# Altium PCB PCB1.PcbDoc (part 3 of 3)
Units mil, origin at the board's own origin, x right, y up, seen from the top; angles counter-clockwise.
Board outline 3937.79 x 3937.79 mil, 4 copper layers (L1, L2, L3, L4), stack 61.811 mil thick; 103 components, 203 nets, 917 pads, 494 vias.
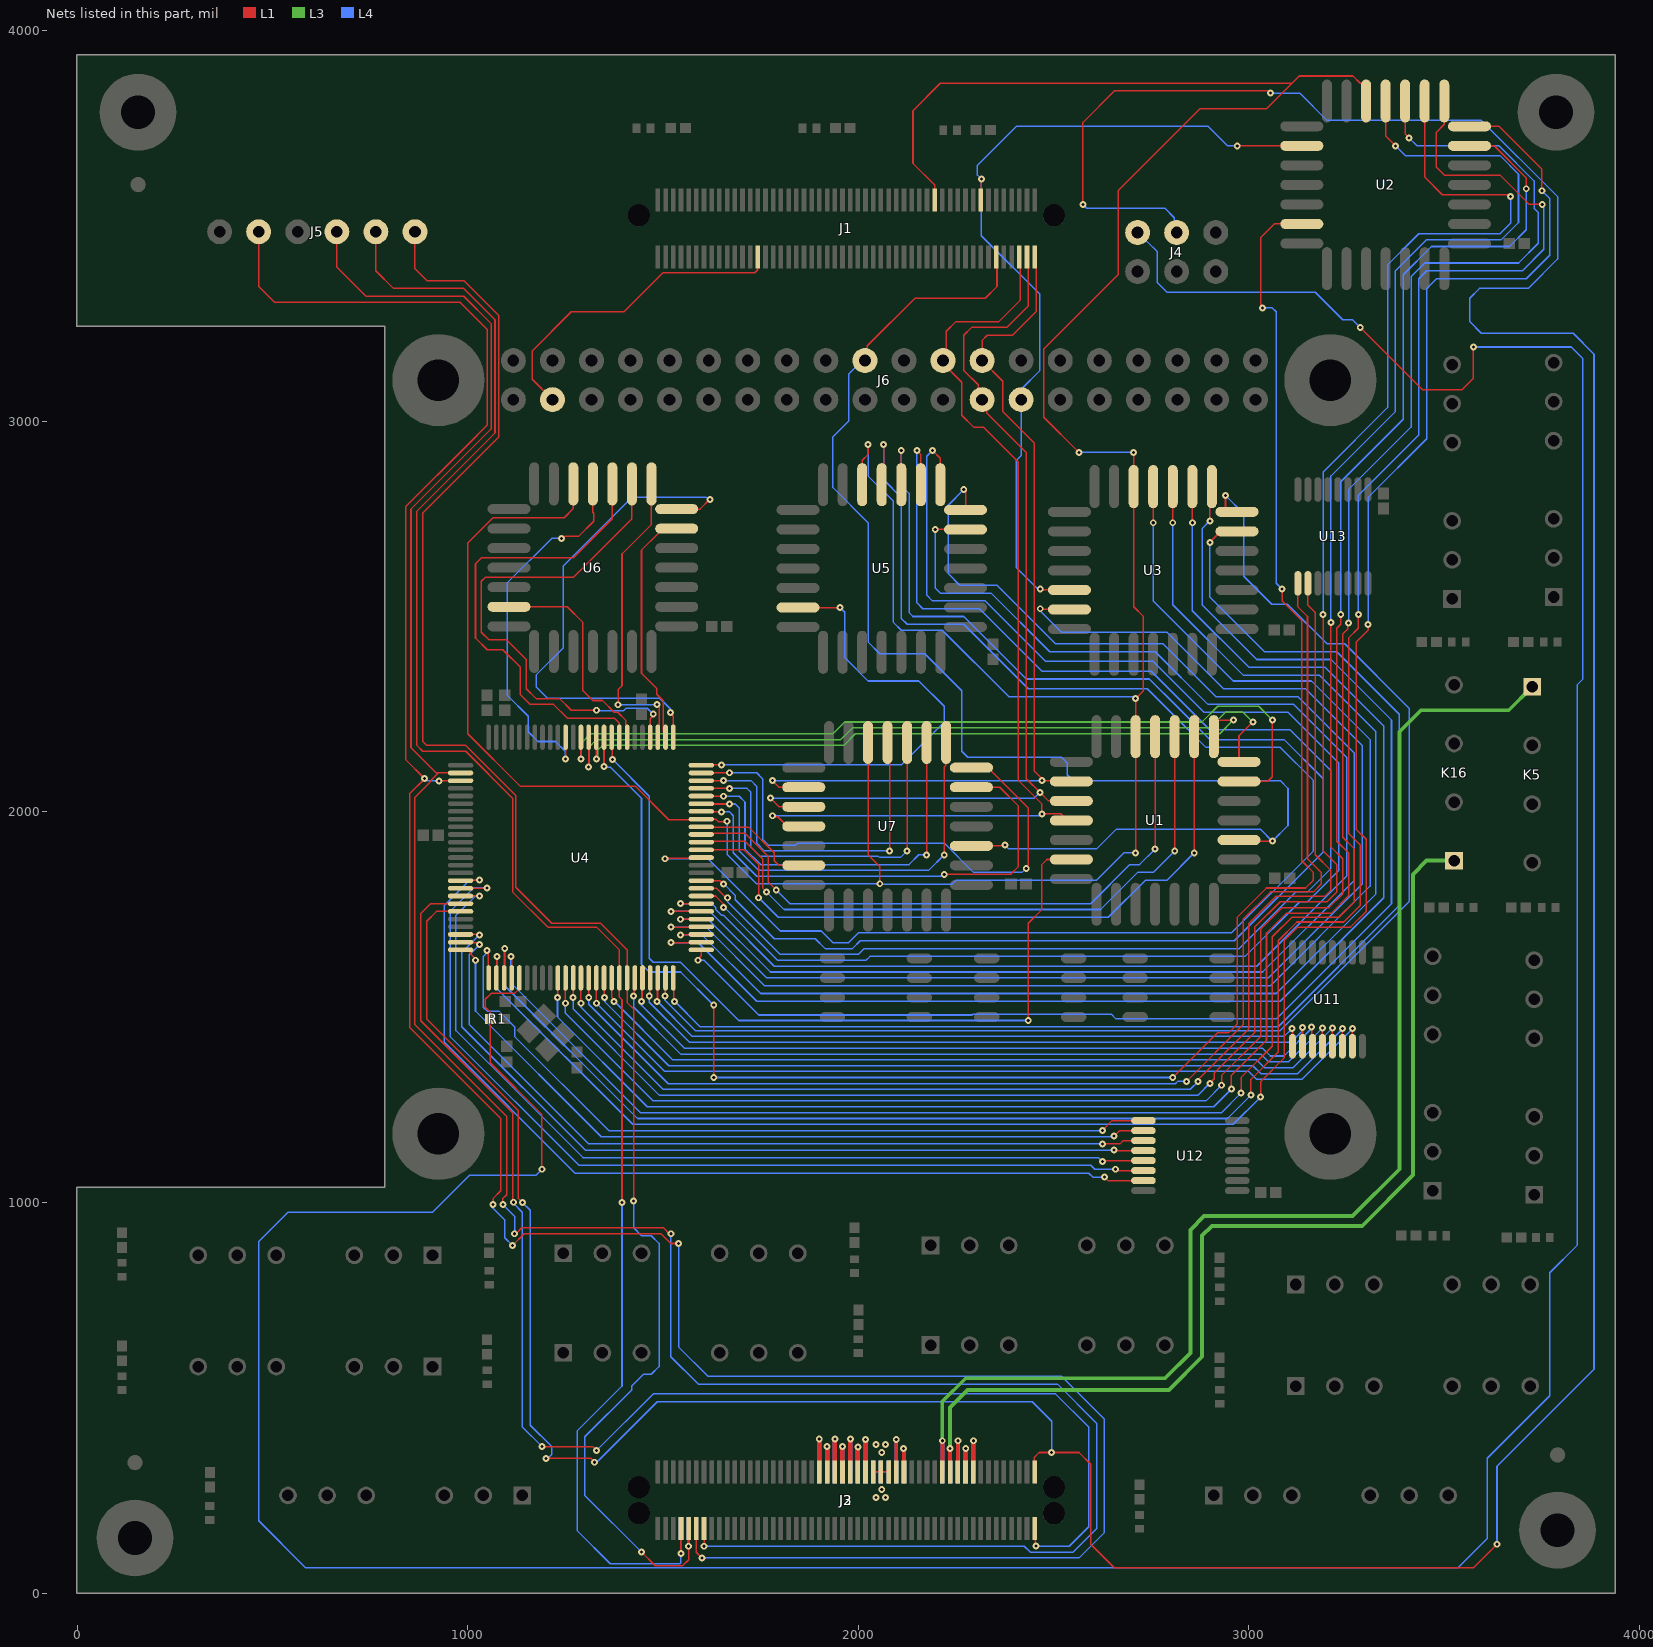
[diagram p5: the nets of this part, all layers, seen from the top]

## Via types
v1: diameter 17.72, hole 7.87, L1 to L4, 494 vias

## Nets (pads, with @x,y where several pads share a name; then routed paths per layer and width w, separated by ;. In a path a pad name is that pad's centre, name@x,y a point inside that pad or via, vN(x,y) a via of type N, cw(c..) or ccw(c..) an arc to the next point about the centre after c; other vN are vias at no path point) (continued)
RASP_GPIO22: J1.98 J6.15 U1.7 U7.7 | length 2459.3
  L1 w4: v1(1775,2035) 1797,2013 U7.7@1860.43,2013 ; J1.98@2430,3425 2435,3420 2435,3295 2380,3240 2290,3240 2270,3220 2270,3130 2306.91,3093.09 2306.91,3065.22 J6.15@2316.93,3055.2 2328.37,3043.76 2328.37,3021.63 2430,2920 2430,2085 v1(2465,2050) 2487.14,2027.86 2545.3,2027.86 U1.7@2545.43,2028
  L4 w4: v1(1775,2035) 2450,2035 v1(2465,2050)
RASP_GPIO23: J1.100 J6.16 U1.6 U7.6 | length 2357.4
  L1 w4: v1(1780,2080) 1797,2063 U7.6@1860.43,2063 ; J1.100@2455,3425 2455,3280 2395,3220 2330,3220 2316.93,3206.93 J6.16@2316.93,3155.2 2370,3102.13 2370,3025 2450,2945 2450,2105 2470,2085 v1(2470,2080) 2543.43,2080 U1.6@2545.43,2078
  L4 w4: v1(1780,2080) v1(2470,2080)
RASP_GPIO24: J1.96 J6.18 U1.8 U7.8 | length 2537
  L1 w4: v1(1780,1990) 1782.62,1987.38 1793.73,1987.38 1818.11,1963 U7.8@1860.43,1963 ; J6.18@2213.36,3151.64 2265,3100 2265,3015 2295,2985 2320,2985 2410,2895 2410,2080 2470,2020 v1(2470,1995) 2518.43,1995 U1.8@2528.43,1985 ; J6.18@2216.93,3155.2 2225,3163.27 2225,3230 2250,3255 2360,3255 2415,3310 2415,3417.91 J1.96@2412.17,3420.75
  L4 w4: v1(1780,1990) 2465,1990 v1(2470,1995)
RASP_GPIO25: J1.90 J6.22 U1.21 U7.21 | length 3696.1
  L1 w4: J6.22@2016.93,3155.2 2023.09,3161.36 2023.09,3193.09 2145,3315 2325,3315 2355,3345 J1.90@2355,3425 ; U7.21@2289.57,1913 2373,1913 v1(2375,1915) ; U1.21@2974.57,1928 2977.56,1925 v1(3060,1925)
  L4 w4: J6.22@2016.93,3155.2 2010.2,3155.2 1975,3120 1975,3000 1935,2960 1935,2830 2025,2740 2025,2435 2055,2405 2170,2405 2265,2310 2265,2155 2280,2140 2520,2140 2535,2125 2535,2095 2550,2080 3080,2080 3100,2060 3100,1965 v1(3060,1925) ; v1(2375,1915) 2385,1905 2610,1905 2660,1955 3030,1955 v1(3060,1925)
RASP_GPIO26: J1.28 J6.37 | length 844.8
  L1 w4: J6.37@1216.93,3055.2 1216.93,3058.07 1214.06,3058.07 1165,3107.13 1165,3180 1265,3280 1400,3280 1500,3380 1735,3380 1742.87,3387.87 J1.28@1742.87,3420.75
RASP_GPIO27: J1.85 J6.13 U2.6 U3.9 | length 2226.8
  L1 w4: J1.85@2313.74,3566.42 2314.37,3567.05 2314.37,3619.37 v1(2315,3620) ; v1(2465.86,2570) 2466.86,2569 2539.43,2569 U3.9@2540.43,2568 ; v1(2970,3705) U2.6@3135.43,3705
  L4 w4: v1(2465.86,2570) 2460,2570 2405,2625 2405,2900 2416.93,2911.93 J6.13@2416.93,3055.2 2416.93,3081.93 2465,3130 2465,3325 2315,3475 v1(2315,3620) 2305,3630 2305,3655 2405,3755 2895,3755 2945,3705 v1(2970,3705)
RELAY0: U4.24 U12.3 | length 2121.5
  L1 w4: U4.24@981.93,1666.46 983.27,1665.12 1024.88,1665.12 v1(1030,1660) ; v1(2625,1150) 2670,1150 2678.39,1158.39 U12.3@2729.92,1158.39
  L4 w4: v1(1030,1660) 1004.14,1634.14 1004.14,1455.86 1310,1150 v1(2625,1150)
RELAY1: U4.25 U12.2 | length 2034.5
  L1 w4: U4.25@981.93,1646.78 1002.89,1646.78 1006.5,1643.17 1006.5,1637.21 1017.38,1626.34 1017.38,1622.62 v1(1020,1620) ; v1(2655,1170) 2668.98,1183.98 U12.2@2729.92,1183.98
  L4 w4: v1(1020,1620) 1020,1490 1341.72,1168.28 2653.28,1168.28 v1(2655,1170)
RELAY2: U4.18 U12.5 | length 2323.6
  L1 w4: U4.18@981.93,1784.57 982.14,1784.79 1029.79,1784.79 v1(1030,1785) ; v1(2625,1105) 2627.2,1107.2 U12.5@2729.92,1107.2
  L4 w4: v1(1030,1785) 1028.49,1783.49 1018.49,1783.49 970,1735 970,1440 1295,1115 2613.99,1115 2623.99,1105 v1(2625,1105)
RELAY3: U4.16 U12.7 | length 2452
  L1 w4: U4.16@981.93,1823.94 982.46,1824.47 1029.47,1824.47 v1(1030,1825) ; v1(2630,1065) 2638.98,1056.02 U12.7@2729.92,1056.02
  L4 w4: v1(1030,1825) 1005,1825 940,1760 940,1410 1275,1075 2590,1075 2600,1065 v1(2630,1065)
RELAY4: U4.45 U11.4 | length 1980.2
  L1 w4: v1(1424.82,1528.81) 1426.31,1530.3 1426.31,1573.44 U4.45@1427.8,1574.93 ; U11.4@3188.23,1400 v1(3188.23,1446.77)
  L4 w4: v1(1424.82,1528.81) 1425,1528.63 1425,1500 1545,1380 3030,1380 3050,1360 3101.46,1360 v1(3188.23,1446.77)
RELAY5: U4.42 U11.5 | length 2061.2
  L1 w4: U4.42@1368.74,1574.93 1368.74,1524.97 1375,1518.71 v1(1375,1515) ; U11.5@3213.82,1400 v1(3213.82,1446.18)
  L4 w4: v1(1375,1515) 1525,1365 3020,1365 3040,1345 3112.64,1345 3211.46,1443.82 3213.82,1443.82 v1(3213.82,1446.18)
RELAY6: U4.26 U12.1 | length 2068.6
  L1 w4: v1(1050,1645) 1052.29,1642.71 1052.29,1576.42 U4.26@1053.78,1574.93 ; v1(2625,1184.14) 2625,1185 2649.57,1209.57 U12.1@2729.92,1209.57
  L4 w4: v1(1050,1645) 1050.84,1644.16 1050.84,1640.84 1040,1630 1040,1500 1050,1490 1080,1490 1120,1450 1120,1425 1360.86,1184.14 2623.28,1184.14 2624.14,1185 v1(2625,1184.14)
RELAY7: U4.23 U12.4 | length 2178.4
  L1 w4: U4.23@981.93,1686.15 1028.85,1686.15 v1(1030,1685) ; v1(2655,1134.14) 2655.86,1134.14 2657.2,1132.8 U12.4@2729.92,1132.8
  L4 w4: v1@1029.92,1684.92 985,1640 985,1450 1300.86,1134.14 v1(2655,1134.14)
RELAY8: U4.17 U12.6 | length 2425.4
  L1 w4: U4.17@981.93,1804.26 982.3,1804.63 1049.63,1804.63 v1(1050,1805) ; v1(2658.23,1085) 2661.61,1081.61 U12.6@2729.92,1081.61
  L4 w4: v1(1050,1805) 1015,1805 955,1745 955,1425 1285,1095 2595,1095 2605,1085 v1(2658.23,1085)
RELAY9: U4.46 U11.3 | length 1926.3
  L1 w4: v1(1445,1515) 1446.24,1516.24 1446.24,1573.68 U4.46@1447.48,1574.93 ; v1(3159.7,1449.63) 3161.17,1448.16 3161.17,1401.47 U11.3@3162.64,1400 U11.3@3160.99,1398.36
  L4 w4: v1(1445,1515) 1445,1505 1555,1395 3035,1395 3055,1375 3089.62,1375 3159.62,1445 3159.62,1449.55 v1(3159.7,1449.63)
RELAY10: U4.41 U11.6 | length 2119.8
  L1 w4: U4.41@1349.06,1574.93 1349.53,1574.45 1349.53,1525.47 v1(1350,1525) ; U11.6@3239.41,1400 3239.41,1444.41 v1(3240,1445)
  L4 w4: v1(1350,1525) 1351.51,1523.49 1351.51,1513.49 1515,1350 3010,1350 3030,1330 3125,1330 v1(3240,1445)
RELAY11: U4.40 U11.7 | length 2179.8
  L1 w4: U4.40@1329.37,1574.93 1329.68,1574.61 1329.68,1510.32 v1(1330,1510) ; U11.7@3265,1400 v1(3265,1445)
  L4 w4: v1(1330,1510) 1504.14,1335.86 2999.14,1335.86 3020,1315 3135,1315 v1(3265,1445)
RELAY12: U4.38 U13.2 | length 3263.6
  L1 w4: v1(1290,1510) U4.38@1290,1574.93 ; v1(2870,1310) 2870,1315 3000,1445 3000,1715 3068.42,1783.42 3193.42,1783.42 3210,1800 3210,1850 3170,1890 3170,2510 3151.02,2528.98 U13.2@3151.02,2584.92
  L4 w4: v1(1290,1510) 1290,1500 1500,1290 2850,1290 v1(2870,1310)
RELAY13: U4.39 U13.1 | length 3191.1
  L1 w4: U4.39@1309.68,1574.93 1309.84,1574.77 1309.84,1525.16 v1(1310,1525) ; v1(2840,1310) 2985,1455 2985,1725 3055,1795 3165,1795 3185,1815 3185,1845 3150,1880 3150,2500 3125.43,2524.57 U13.1@3125.43,2584.92
  L4 w4: v1(1310,1525) 1310,1507.57 1513.43,1304.14 2811.57,1304.14 2817.43,1310 v1(2840,1310)
RELAY14: U4.47 U11.2 | length 1846.5
  L1 w4: v1(1464.85,1528.72) 1466.01,1529.88 1466.01,1573.77 U4.47@1467.17,1574.93 ; U11.2@3137.05,1400 v1(3137.05,1447.95)
  L4 w4: v1(1464.85,1528.72) 1465,1528.57 1465,1512.57 1567.57,1410 3107.43,1410 3137.05,1439.62 v1(3137.05,1447.95)
RELAY15: U4.48 U11.1 | length 1776.9
  L1 w4: v1(1485,1515) 1485.93,1515.93 1485.93,1574 U4.48@1486.85,1574.93 ; v1(3110,1445) 3111.46,1443.54 U11.1@3111.46,1400
  L4 w4: v1(1485,1515) 1575,1425 3090,1425 v1(3110,1445)
RESET1: U1.10 U4.84 | length 2136.3
  L1 w4: U4.84@1368.74,2191.07 1369.99,2189.82 1369.99,2135.01 v1(1371.24,2133.76) ; v1(2435,1465.86) 2435,1715 2470,1750 2470,1865 2483,1878 U1.10@2545.43,1878
  L4 w4: v1(1371.24,2133.76) 1465,2040 1465,1625 1475,1615 1545,1615 1694.14,1465.86 v1(2435,1465.86)
RESET2: U2.10 U4.85 | length 4775.5
  L1 w4: v1(1349.06,2115.94) U4.85@1349.06,2191.07 ; v1@1626.66,1498.34 1630,1495 v1(1630,1320) ; v1(2805,1320) 2920,1435 2948.69,1435 2969.7,1456.01 2969.7,1729.7 3045,1805 3145,1805 3165,1825 3165,1845 3135,1875 3135,2490 3085,2540 v1(3085,2570) ; v1(3035,3290) 3030,3295 3030,3470 3065,3505 U2.10@3135.43,3505
  L4 w4: v1@1350.71,2114.29 1365.71,2114.29 1445,2035 1445,1610 1465,1590 1545,1590 v1(1630,1505) ; v1(1630,1320) v1(2805,1320) ; v1(3035,3290) 3060,3290 3070,3280 3070,2585 v1(3085,2570)
RESET3: U3.10 U4.55 | length 3363.6
  L1 w4: v1(1545,1725) U4.55@1598.07,1725 ; v1(2465.86,2520) 2466.86,2519 2539.43,2519 U3.10@2540.43,2518
  L4 w4: v1(1545,1725) 1615,1725 1765,1575 3050,1575 3290,1815 3290,2170 3145,2315 2935,2315 2790,2460 2520,2460 2464.59,2515.41 2465.86,2516.69 v1(2465.86,2520)
RESET4: U4.75 U5.10 | length 1255.1
  L1 w4: U4.75@1598.07,2119.22 1598.89,2120.04 v1(1649.96,2120.04) ; U5.10@1845.43,2523 v1(1953,2523)
  L4 w4: v1(1649.96,2120.04) 1650.78,2120.86 2110.86,2120.86 2200,2210 ; v1(1953,2523) 1965,2510.99 1965,2395 2025,2335 2155,2335 2220,2270 2220,2230 2200,2210
RESET5: U4.82 U6.10 | length 566.5
  L1 w4: U6.10@1105.87,2525 1255,2525 1295,2485 1295,2310 1320,2285 1345,2285 1375,2255 1384.14,2255 1405,2234.14 1405,2222.87 1408.11,2219.76 U4.82@1408.11,2191.07
RESET6: U4.67 U7.10 | length 317.3
  L1 w4: U4.67@1595,1960 1720,1960 1785,1895 1785,1875 1797,1863 U7.10@1860.43,1863
RST: J4.5 R1.1 U4.30 | length 9943.1
  L1 w4: U4.30@1132.52,1574.93 1132.52,1547.52 1120.17,1535.17 1060.17,1535.17 1045,1520 1045,1500 1057.6,1487.4 R1.1@1057.6,1470 1057.6,1357.4 1190,1225 v1(1190,1085) ; v1(3285,3240) 3445,3080 3545,3080 3574.69,3109.69 v1@3574.69,3190
  L4 w4: v1(1190,1085) 1175,1070 1005,1070 910,975 540,975 465,900 465,185 585,65 3535,65 3610,140 3610,345 3770,505 3770,820 3840,890 3840,2325 3855,2340 3855,3160 3825,3190 v1(3575,3190) ; J4.5@2715,3483 2765,3434.62 2765,3355 2790,3330 3170,3330 3240,3260 3265,3260 v1(3285,3240)
S: J2.43 J3.44 | length 168.9
  L1 w11.55: v1(1900,394.82) 1900.35,394.46 J2.43@1900.35,310.51
  L4 w11.55: v1(1900,394.82) 1900.25,394.57 1900.25,310.62 J3.44@1900.35,310.51
SCK: J2.99 J4.3 U4.20 | length 10436.3
  L1 w4: U4.20@981.93,1745.2 920.2,1745.2 895,1720 895,1470 1130,1235 1130,1010 v1(1140,1000) ; v1(1200,345) 1315,345 v1(1325,335) ; J2.99@2451.54,310.51 2450.77,311.28 2450.77,348.01 2462.76,360 v1(2495,360) 2565,360 2595,330 2595,125 2655,65 3575,65 v1(3635,125) ; v1(2575,3555) 2575,3765 2655.86,3845.86 3049.14,3845.86 v1(3055,3840)
  L4 w4: v1(1140,1000) 1160,980 1160,430 1215,375 1215,355 1205,345 v1(1200,345) ; v1(1325,335) 1328.71,335 1332.72,339.01 1334.01,339.01 1485,490 2445,490 2495,440 v1(2495,360) ; v1(2575,3555) 2585,3545 2785,3545 2809.11,3520.89 2809.11,3488.88 J4.3@2815,3483 2815,3475 J4.3@2807,3475 ; v1(3055,3840) 3130,3840 3200,3770 3595,3770 3790,3575 3790,3415 3715,3340 3590,3340 3565,3315 3565,3255 3595,3225 3830,3225 3883.27,3171.73 3883.27,573.27 3635,325 v1(3635,125)
SCL: J2.8 J3.7 J5.5 U4.43 | length 4495.9
  L1 w4: J5.5@765,3485 765,3385 810,3340 990,3340 1070,3260 1070,2970 870,2770 870,2170 885,2155 995,2155 1115,2035 1115,1795 1205,1705 1330,1705 1388.43,1646.57 U4.43@1388.43,1574.93 1388.43,1525.66 1395,1519.08 v1(1395,1000) ; v1(1546.02,101.02) J2.8@1546.02,164.84
  L4 w4: v1(1395,1000) 1395,530 1280,415 1280,160 1365,75 1543.68,75 1546.02,77.34 J3.7@1546.02,164.84
SDA: J2.10 J3.9 J5.6 U4.44 | length 4419.2
  L1 w4: J5.6@865,3485 865,3390 895,3360 990,3360 1079.04,3270.96 1079.04,2959.04 1025,2905 ; 1025,2905 885,2765 885,2180 895,2170 995,2170 1123,2042 1123,1807 1215,1715 1340,1715 1408.11,1646.89 U4.44@1408.11,1574.93 1408.11,1511.89 1425,1495 v1(1425,1004.14) ; v1(1445,105) 1480,70 1550,70 1565.71,85.71 v1@1565.71,120.71 ; v1(1565,120) v1@1565.71,120.71 ; J2.10@1565.71,164.84 v1@1565.71,120.71
  L4 w4: v1(1425,1004.14) 1425,935 1445,915 1470,915 1490,895 1490,580 1470,560 1450,560 1420,530 1420,520 1300,400 1300,250 v1(1445,105) ; v1(1565,120) 1565.35,120.35 1565.35,164.49 J3.9@1565.71,164.84
SS: J2.100 U4.19 | length 3561.5
  L1 w4: U4.19@981.93,1764.89 904.89,1764.89 880,1740 880,1465 1115,1230 1115,1002.55 v1(1117.04,1000.51) ; v1(1190,375) 1320,375 v1(1330,365) ; J2.100@2451.54,164.84 2453.27,163.11 2453.27,122.59 v1(2455,120.86)
  L4 w4: v1(1117.04,1000.51) 1117.04,997.96 1140,975 1140,425 v1(1190,375) ; v1(1330,365) 1475,510 2505,510 2590,425 2590,170 2540,120 2455.86,120 v1(2455,120.86)
STROBE: J1.73 U1.2 U2.2 U3.2 U4.68 U5.2 U6.2 U7.2 | length 8501.4
  L1 w4: U6.2@1270.43,2839.57 1270.43,2776.32 1247.11,2753 1064.96,2753 1000,2688.04 1000,2200 1135,2065 1430,2065 1515,1980 U4.68@1598.07,1980 ; U4.68@1598.07,1981.42 1635.13,1981.42 1641.55,1975 1663.28,1975 v1(1664.14,1975.86) ; U5.2@2010,2837.56 2010,2900 2025,2915 v1(2025,2940) ; U7.2@2025,2177.56 2025,1890 2055,1860 v1(2055,1815.86) ; J1.73@2195.63,3566.42 2195.63,3604.37 2140,3660 2140,3795 2210,3865 3110,3865 ; v1(2565,2920) 2475,3010 2475,3185 2665,3375 2665,3590 2875,3800 3045,3800 3110,3865 ; v1(2705,2920) U3.2@2705,2832.56 2705,2525 2730,2500 2730,2310 v1(2710,2290) U1.2@2710,2192.56 v1(2710,1895) ; U2.2@3300,3819.57 3300,3855.22 3290.03,3865.19 3284.72,3865.19 3266.27,3883.65 3128.65,3883.65 3110,3865
  L4 w4: v1(1664.14,1975.86) 1665,1975 1665,1890 1739.14,1815.86 v1(2055,1815.86) ; v1(2025,2940) 2025,2860 2090,2795 2090,2485 2110,2465 2215,2465 2385,2295 2701.29,2295 2706.29,2290 v1(2710,2290) ; v1@2055,1815 2240,1815 2250,1825 2610,1825 2680,1895 v1(2710,1895) ; v1(2565,2920) v1(2705,2920)
SW1: U1.24 U4.88 | length 2155.3
  L1 w4: v1(1290,2135) U4.88@1290,2191.07 ; U1.24@2974.57,2078 3048,2078 3060,2090 v1(3060,2235)
  L3 w4: v1(1290,2135) 1290,2175 1315,2200 1935,2200 1965,2230 2880,2230 2920,2270 3025,2270 v1(3060,2235)
SW2: U1.25 U4.87 | length 1990.1
  L1 w4: U4.87@1309.68,2191.07 1309.84,2190.91 v1(1309.84,2115.16) ; U1.25@2974.57,2128 2974.57,2194.57 v1(3010,2230)
  L3 w4: v1@1310,2115.16 1310,2165 1330,2185 1955,2185 1985,2215 2900,2215 2940,2255 2985,2255 v1(3010,2230)
SW3: U1.26 U4.86 | length 1825.1
  L1 w4: U4.86@1329.37,2191.07 1329.37,2135.63 v1(1330,2135) ; U1.26@2910,2192.56 2910,2225.03 2919.97,2235 v1(2960,2235)
  L3 w4: v1@1332.43,2135 1332.43,2157.43 1345,2170 1962.5,2170 1992.5,2200 2925,2200 v1(2960,2235)
SW4: U1.27 U4.64 | length 1749.2
  L1 w4: U4.64@1598.07,1902.68 1707.32,1902.68 1745,1865 v1(1745,1780) ; v1(2860,1895) U1.27@2860,2192.56
  L4 w4: v1(1745,1780) 1795,1730 2640,1730 2735,1825 2790,1825 v1(2860,1895)
SW5: U1.28 U4.65 | length 1684.1
  L1 w4: U4.65@1598.07,1922.37 1626.76,1922.37 1629.39,1925 1710,1925 1755,1880 1755,1805 v1(1765,1795) ; v1(2810,1900) U1.28@2810,2192.56
  L4 w4: v1(1765,1795) 1810,1750 2620,1750 2715,1845 2755,1845 v1(2810,1900)
SW6: U1.1 U4.66 | length 1621.3
  L1 w4: U4.66@1598.07,1942.05 1601.02,1945 1710,1945 1770,1885 1770,1820 v1(1790,1800) ; v1(2760,1905) U1.1@2760,2192.56
  L4 w4: v1(1790,1800) 1825,1765 2595,1765 2695,1865 2720,1865 v1(2760,1905)
SW7: U2.24 U4.35 | length 4973.6
  L1 w4: v1(1230,1525) 1230.47,1525.47 1230.47,1574.45 U4.35@1230.94,1574.93 ; v1(2955,1290) 2955,1325 3045,1415 3045,1690 3095,1740 3210,1740 3255,1785 3255,1895 3225,1925 3225,2470 3235,2480 v1(3235,2505) ; U2.24@3564.57,3705 3627.81,3705 3710,3622.81 v1(3710,3595)
  L4 w4: v1(1230,1525) 1230,1475 1460,1245 2910,1245 v1(2955,1290) ; v1(3235,2505) 3235,2845 3395,3005 3395,3375 3467.28,3447.28 3667.28,3447.28 3710,3490 v1(3710,3595)
SW8: U2.25 U4.27 | length 5421.5
  L1 w4: U4.27@1073.46,1574.93 1074.23,1575.69 1074.23,1629.23 v1(1075,1630) ; v1(3030,1270) 3030,1310 3090,1370 3090,1670 3125,1705 3260,1705 3300,1745 3300,1930 3275,1955 3275,2435 3305,2465 v1(3305,2480) ; U2.25@3564.57,3755 3640,3755 3750,3645 v1(3750,3590)
  L4 w4: v1(1075,1630) 1075,1547.43 1422.43,1200 2960,1200 v1(3030,1270) ; v1(3305,2480) 3305,2805 3455,2955 3455,3340 3480,3365 3710,3365 3770,3425 3770,3570 v1(3750,3590)
SW9: U2.26 U4.28 | length 5565.6
  L1 w4: U4.28@1093.15,1574.93 1094.07,1575.85 1094.07,1649.07 v1(1095,1650) ; v1(3005,1275) 3005,1315 3075,1385 3075,1670 3123,1718 3243,1718 3285,1760 3285,1915 3255,1945 3255,2445 3280,2470 v1(3280,2505) ; U2.26@3500,3819.57 3500,3760 3480,3740 3480,3650 3500,3630 3642.43,3630 3700,3572.43 3717.43,3555 v1(3750.86,3555)
  L4 w4: v1(1095,1650) 1095,1555 1435,1215 2945,1215 v1(3005,1275) ; v1(3280,2505) 3280,2810 3435,2965 3435,3365 3455,3385 3700,3385 3755,3440 3755,3547.15 3750.86,3551.29 v1(3750.86,3555)
SW10: U2.27 U4.37 | length 5058.6
  L1 w4: v1(1270,1525) 1270.16,1525.16 1270.16,1574.77 U4.37@1270.31,1574.93 ; v1(2900,1305) 2911.51,1316.51 2911.51,1331.51 3015,1435 3015,1705 3080,1770 3200,1770 3225,1795 3225,1865 3190,1900 v1(3190,2505) ; U2.27@3450,3819.57 3450,3625 3495,3580 3665,3580 v1(3670,3575)
  L4 w4: v1(1270,1525) 1270,1495 1490,1275 2870,1275 v1(2900,1305) ; v1(3190,2505) 3190,2870 3355,3035 3355,3400 3435,3480 3642.43,3480 3670,3507.57 v1(3670,3575)
SW11: U2.28 U4.29 | length 5506.1
  L1 w4: v1(1110.86,1630) 1112.83,1628.02 U4.29@1112.83,1574.93 ; v1(2980,1280) 2980,1320 3060,1400 3060,1680 3110,1730 3230,1730 3270,1770 3270,1905 3240,1935 3240,2455 3253.48,2468.48 3253.48,2481.83 v1(3255,2483.34) ; U2.28@3400,3819.57 3400,3735 v1(3410,3725)
  L4 w4: v1(1110.86,1630) 1110.86,1561.71 1442.57,1230 1445,1230 2930,1230 v1(2980,1280) ; v1(3255,2483.34) 3255,2825 3415,2985 3415,3370 3450,3405 3690,3405 3740.86,3455.86 3740.86,3534.14 3730,3545 3730,3615 3640,3705 3430,3705 v1(3410,3725)
SW12: U2.1 U4.36 | length 5204.4
  L1 w4: v1(1250,1510) 1250.32,1510.32 1250.32,1574.61 U4.36@1250.63,1574.93 ; v1(2930,1300) 2930,1325 3030,1425 3030,1700 3085,1755 3205,1755 3240,1790 3240,1880 3210,1910 v1(3210,2485) ; U2.1@3350,3819.57 3350,3730 v1(3375,3705)
  L4 w4: v1(1250,1510) 1250,1485 1475,1260 2890,1260 v1(2930,1300) ; v1(3210,2485) 3210,2860 3375,3025 3375,3385 3455,3465 3646.31,3465 3690,3508.69 3690,3632.43 3642.43,3680 3400,3680 v1(3375,3705)
SW13: U3.24 U4.50 | length 3392.5
  L1 w4: U4.50@1526.22,1574.93 1527.71,1573.43 1527.71,1517.29 v1(1530,1515) ; v1(2900,2690) 2900,2690.38 2927.62,2718 U3.24@2969.57,2718
  L4 w4: v1(1530,1515) 1595,1450 3075,1450 3385,1760 3385,2250 3225,2410 3040,2410 2900,2550 v1(2900,2690)
SW14: U3.25 U4.49 | length 3482.1
  L1 w4: v1(1504.89,1528.66) 1505.71,1529.48 1505.71,1574.1 U4.49@1506.54,1574.93 ; v1(2940,2810) 2940,2777.97 2949.97,2768 U3.25@2969.57,2768
  L4 w4: v1(1504.89,1528.66) 1505,1528.54 1505,1517.57 1582.57,1440 3080,1440 3410,1770 3410,2265 3245,2430 3200,2430 3098.29,2531.71 3058.29,2531.71 2987,2603 2987,2763 v1(2940,2810)
SW15: U3.26 U4.51 | length 3381
  L1 w4: v1(1590,1620) 1590,1623.71 1598.07,1631.78 U4.51@1598.07,1646.78 ; v1(2900,2745) 2900,2827.56 U3.26@2905,2832.56
  L4 w4: v1(1590,1620) 1605,1620 1745,1480 2291.57,1480 2293.29,1481.72 2648.28,1481.72 2660,1470 3070,1470 3365,1765 3365,2235 3210,2390 3020,2390 2880,2530 2880,2725 v1(2900,2745)
SW16: U3.27 U4.52 | length 3445.3
  L1 w4: v1(1520,1665) 1596.61,1665 U4.52@1598.07,1666.46 ; v1(2855,2740) U3.27@2855,2832.56
  L4 w4: v1(1520,1665) 1590,1665 1740,1515 3080,1515 3345,1780 3345,2220 3195,2370 3000,2370 2855,2515 v1(2855,2740)
SW17: U3.28 U4.53 | length 3373.5
  L1 w4: v1(1545,1685) 1596.93,1685 U4.53@1598.07,1686.15 ; v1(2805,2740) U3.28@2805,2832.56
  L4 w4: v1(1545,1685) 1600,1685 1750,1535 3070,1535 3325,1790 3325,2205 3180,2350 2985,2350 2805,2530 v1(2805,2740)
SW18: U3.1 U4.54 | length 3405.8
  L1 w4: v1(1520,1705) 1597.24,1705 U4.54@1598.07,1705.83 ; v1(2755,2740) U3.1@2755,2832.56
  L4 w4: v1(1520,1705) 1610,1705 1760,1555 3055,1555 3310,1810 3310,2185 3160,2335 2960,2335 2755,2540 v1(2755,2740)
SW19: U4.57 U5.24 | length 3688.2
  L1 w4: v1(1545,1765.86) 1545.86,1765 U4.57@1598.07,1765 ; v1(2197,2723) U5.24@2274.57,2723
  L4 w4: v1(1545,1765.86) 1545.86,1765 1625,1765 1635,1755 1635,1750 1650,1735 1655,1735 1785,1605 3020,1605 3250,1835 3250,2140 3115,2275 2895,2275 2760,2410 2490,2410 2340,2560 2210,2560 2197,2573 v1(2197,2723)
SW20: U4.56 U5.25 | length 3830.6
  L1 w4: v1(1520,1745) U4.56@1598.07,1745 ; v1(2270,2825) 2274.57,2820.43 U5.25@2274.57,2773
  L4 w4: v1(1520,1745) 1620,1745 1775,1590 3035,1590 3270,1825 3270,2150 3125,2295 2915,2295 2780,2430 2505,2430 2355,2580 2260,2580 2230,2610 2230,2785 v1(2270,2825)
SW21: U4.58 U5.26 | length 3785
  L1 w4: U4.58@1598.07,1784.57 1634.68,1784.57 1655,1764.26 v1(1655,1755) ; v1(2190,2925) 2210,2905 U5.26@2210,2837.56
  L4 w4: v1(1655,1755) 1655,1757.94 1792.94,1620 2020,1620 2030,1630 2990,1630 3130,1770 3150,1770 3230,1850 3230,2125 3100,2255 2885,2255 2755,2385 2480,2385 2325,2540 2190,2540 2175,2555 2175,2910 v1(2190,2925)
SW22: U4.59 U5.27 | length 3740.5
  L1 w4: U4.59@1598.07,1804.26 1637.3,1804.26 1661.55,1780 v1(1665,1780) ; v1(2150,2925) 2160,2915 U5.27@2160,2837.56
  L4 w4: v1@1663.27,1780 v1(1665,1780) ; 1664.99,1770.01 1800,1635 2000,1635 2015,1650 2975,1650 3120,1795 3150,1795 3210,1855 3210,2105 3105,2210 2900,2210 2750,2360 2470,2360 2310,2520 2165,2520 2150,2535 v1(2150,2925)
SW23: U4.60 U5.28 | length 3707.2
  L1 w4: U4.60@1598.07,1823.94 1645.05,1823.94 1653.99,1815 v1(1655,1815) ; U5.28@2110,2837.56 v1(2110,2925)
  L4 w4: v1(1655,1815) 1655.98,1815 1685,1785.98 1685,1775 1785,1675 1890,1675 1915,1650 1985,1650 2005,1670 2962.57,1670 3190,1897.43 3190,2085 3090,2185 2900,2185 2815,2270 2745,2340 2430,2340 2270,2500 2140,2500 2130,2510 2130,2815 2110,2835 v1(2110,2925)
SW24: U4.63 U5.1 | length 3915.8
  L1 w4: v1(1505,1880) 1506.5,1881.5 1596.58,1881.5 U4.63@1598.07,1883 ; U5.1@2060,2837.56 2065,2842.56 v1(2065,2940)
  L4 w4: v1(1505,1880) 1615,1880 1800,1695 1905,1695 1935,1665 1975,1665 2000,1690 2955,1690 3165,1900 3165,2080 3080,2165 2890,2165 2800,2255 2740,2315 2435,2315 2270,2480 2125,2480 2110,2495 2110,2805 2065,2850 v1(2065,2940)
SW25: U4.77 U6.24 | length 608.5
  L1 w4: U4.77@1505,2200 1500.86,2204.14 1500.86,2284.14 1484.06,2300.94 1484.06,2315.94 1445,2355 1445,2670 1487.05,2712.05 1487.05,2713.53 1498.52,2725 U6.24@1535,2725
SW26: U4.76 U6.25 | length 1326.7
  L1 w4: v1(1518.79,2253.79) 1518.79,2252.02 1526.22,2244.59 U4.76@1526.22,2191.07 ; U6.25@1535,2775 1595,2775 v1(1620,2800)
  L4 w4: v1(1518.79,2253.79) 1518.79,2263.64 1491.57,2290.86 1204.14,2290.86 1175,2320 1175,2350 1245,2420 1245,2630 1420,2805 1611.29,2805 1616.29,2800 v1(1620,2800)
SW27: U4.78 U6.26 | length 772.7
  L1 w4: v1(1385,2274.14) 1385,2312.57 1395,2322.57 1395,2660 1470.43,2735.43 U6.26@1470.43,2839.57 ; v1(1485,2275) 1490.86,2269.14 U4.78@1490.86,2205.86
  L4 w4: v1(1385,2274.14) 1484.14,2274.14 v1(1485,2275)
SW28: U4.79 U6.27 | length 1309.7
  L1 w4: v1(1330,2260) 1265,2260 1235,2290 1175,2290 1150,2315 1150,2390 1100,2440 1055,2440 1035,2460 1035,2590 1045,2600 1270,2600 1420.43,2750.43 U6.27@1420.43,2839.57 ; U4.79@1467.17,2191.07 1467.17,2238.45 1475,2246.29 v1(1475,2250)
  L4 w4: v1(1330,2260) 1331.72,2258.28 1398.28,2258.28 1405,2265 1460,2265 v1(1475,2250)
SW29: U4.83 U6.28 | length 1212.8
  L1 w4: U6.28@1370.43,2839.57 1370.43,2750.43 1270,2650 1035,2650 1020,2635 1020,2445 1050,2415 1090,2415 1135,2370 1135,2300 1160,2275 1220,2275 1255,2240 1375,2240 1388.43,2226.57 U4.83@1388.43,2191.07
SW30: U4.90 U6.1 | length 979.2
  L1 w4: v1(1240,2700) 1243.71,2700 1248.71,2705 1283.69,2705 1322.69,2744 1322.69,2764.51 1320.43,2766.76 U6.1@1320.43,2839.57 ; v1(1250,2135) 1250.63,2135.63 U4.90@1250.63,2191.07
  L4 w4: v1(1240,2700) 1215,2700 1100.86,2585.86 1100.86,2299.14 1155,2245 1155,2205 1180,2180 1225,2180 1250,2155 v1(1250,2135)
SW31: U4.69 U7.24 | length 1285
  L1 w4: U4.69@1598.07,2001.11 1598.62,2000.55 1649.45,2000.55 v1(1650,2000) ; v1(2220,1840) 2390,1840 2410,1860 2410,2015 2362,2063 U7.24@2289.57,2063 U7.24@2246.66,2063
  L4 w4: v1(1650,2000) 1670,2000 1680,1990 1680,1895 1740,1835 2211.29,1835 2216.29,1840 v1(2220,1840)
SW32: U4.74 U7.25 | length 1381.8
  L1 w4: U4.74@1598.07,2100 v1(1670,2100) ; U7.25@2289.57,2113 2332,2113 2435,2010 2435,1863.71 2430,1858.71 v1(2430,1855)
  L4 w4: v1(1670,2100) 1740,2100 1755,2085 1755,1930 1770,1915 1840,1915 1845,1920 2220,1920 2295,1845 2418.99,1845 2428.99,1855 v1(2430,1855)
SW33: U4.70 U7.26 | length 1063
  L1 w4: U4.70@1598.07,2020 v1(1670,2020) ; v1(2220,1890) 2220,2115 2223.79,2118.79 2223.79,2176.35 U7.26@2225,2177.56
  L4 w4: v1(1670,2020) 1685,2020 1695,2010 1695,1900 1745,1850 2180,1850 v1(2220,1890)
SW34: U4.71 U7.27 | length 1017.6
  L1 w4: U4.71@1598.07,2040 v1(1655,2040) ; v1(2175,1890) U7.27@2175,2177.56
  L4 w4: v1(1655,2040) 1695,2040 1710,2025 1710,1905 1750,1865 2130,1865 2155,1890 v1(2175,1890)
SW35: U4.72 U7.28 | length 965.9
  L1 w4: U4.72@1598.07,2060 v1(1670,2060) ; v1(2125,1900) U7.28@2125,2177.56
  L4 w4: v1(1670,2060) 1715,2060 1725,2050 1725,1910 1749.14,1885.86 2051.57,1885.86 2053.29,1884.14 2109.14,1884.14 v1(2125,1900)
SW36: U4.73 U7.1 | length 926.1
  L1 w4: U4.73@1598.07,2080 v1(1655,2080) ; U7.1@2075,2177.56 2080,2172.56 v1(2080,1900)
  L4 w4: v1@1650,2080 v1(1655,2080) 1725,2080 1740,2065 1740,1920 1760,1900 v1(2080,1900)
T: J2.45 J3.46 | length 129
  L1 w11.55: J2.45@1920.04,310.51 1920,310.55 v1(1920,375)
  L4 w11.55: J3.46@1920.04,310.51 v1(1920,375)
U: J2.47 J3.48 | length 168.8
  L1 w11.55: J2.47@1939.72,310.51 1939.72,394.54 v1(1940,394.82)
  L4 w11.55: J3.48@1939.72,310.51 1939.83,310.62 1939.83,394.64 v1(1940,394.82)
VIRB_RX: J2.14 J5.4 U4.2 | length 6426.5
  L1 w4: J5.4@665,3485 665,3395 740,3320 990,3320 1060,3250 1060,2980 855,2775 855,2164.06 919.53,2099.53 924.53,2099.53 ; U4.2@981.93,2099.53 924.53,2099.53 ; v1(1090,995) 1090,1010 1100,1020 1100,1220 865,1455 865,2037.57 905.86,2078.43 905.86,2080.86 924.53,2099.53 ; v1(1120,920) 1123.71,920 1138.71,935 1501.29,935 1516.29,920 v1(1520,920) ; v1(1605,120) 1605.08,120.08 J2.14@1605.08,164.84
  L4 w4: v1(1090,995) 1120,965 v1(1120,920) ; v1(1520,920) 1520,605 1590,535 2510,535 2610,435 2610,165 2550,105 2440,105 2425,120 v1(1605,120)
VIRB_TX: J2.12 J5.2 U4.3 | length 6768.5
  L1 w4: J5.2@465,3485 465,3345 505,3305 980,3305 1050,3235 1050,2990 1000,2940 ; v1(926.21,2078.79) 926.74,2079.32 981.4,2079.32 U4.3@981.93,2079.85 ; 1000,2940 841.14,2781.14 841.14,2133.86 v1(890,2085) 852,2047 852,1448 1085,1215 1085,1030 1065,1010 v1(1065,995) ; v1(1115,890) 1145,920 1495,920 1520,895 v1(1540,895) ; J2.12@1585.39,164.84 1585.39,104.61 v1(1600,90)
  L4 w4: v1(890,2085) 895,2080 925,2080 v1(926.21,2078.79) ; v1(1065,995) 1065,991.69 1061.66,988.34 1095,955 1095,910 v1(1115,890) ; v1(1540,895) 1540,630 1615,555 2520,555 2630,445 2630,155 2565,90 v1(1600,90)
W: J2.49 J3.50 | length 129
  L1 w11.55: J2.49@1959.41,310.51 1959.41,374.41 1959.46,374.46 v1(1959.46,375)
  L4 w11.55: J3.50@1959.41,310.51 v1(1959.46,375)
X: J2.51 J3.52 | length 169.4
  L1 w11.55: J2.51@1979.09,310.51 1979.09,393.91 v1(1980,394.82)
  L4 w11.55: J3.52@1979.09,310.51 1979.15,310.56 1979.15,393.96 v1(1980,394.82)
X1: J2.57 J2.59 J2.61 J3.58 J3.60 J3.62 | length 78.7
  L1 w4: J2.57@2038.15,310.51 J2.59@2057.83,310.51 J2.61@2077.52,310.51
  L4 w4: J3.58@2038.15,310.51 J3.60@2057.83,310.51 J3.62@2077.52,310.51
  other v1: 2045,245 2070,245 2060,265 2060,360 2045,380 2070,380
X2: J2.63 J3.64 | length 164.6
  L1 w10: J2.63@2097.2,310.51 v1(2097.2,392.8)
  L4 w10: J3.64@2097.2,310.51 v1(2097.2,392.8)
X3: J2.65 J3.66 | length 119.7
  L1 w4: v1(2116.06,370) 2116.06,368.94 v1@2116.89,368.11
  L1 w10: J2.65@2116.89,310.51 v1@2116.89,368.11
  L4 w4: v1(2116.06,370) v1@2116.48,369.59 ; J3.66@2116.48,310.93 J3.66@2116.89,310.51
  L4 w10: J3.66@2116.48,310.93 v1@2116.48,369.59
X4: J2.75 J3.76 K5.1 | length 3367.9
  L1 w4: v1(2215,390) v1@2215.32,389.69
  L1 w10: J2.75@2215.32,310.51 v1@2215.32,389.69
  L3 w10: v1(2215,390) 2215,490 2275,550 2785,550 2850,615 2850,930 2885,965 3265,965 3385,1085 3385,2205 3440,2260 3665,2260 K5.1@3725,2320
  L4 w4: v1(2215,390) v1@2215.16,389.84 ; J3.76@2215.16,310.67 J3.76@2215.32,310.51
  L4 w10: J3.76@2215.16,310.67 v1@2215.16,389.84
X5: J2.77 J3.78 K16.1 | length 2726.5
  L1 w10: J2.77@2235,310.51 v1(2235,370)
  L3 w10: v1(2235,370) 2235,475 2280,520 2795,520 2880,605 2880,915 2905,940 3290,940 3420,1070 3420,1840 3455,1875 K16.1@3525,1875
  L4 w10: J3.78@2235,310.51 v1(2235,370)
X6: J2.79 J3.80 | length 159.2
  L1 w4: v1@2254.69,389.69 v1(2255,390)
  L1 w10: J2.79@2254.69,310.51 v1@2254.69,389.69
  L4 w4: J3.80@2254.69,310.51 J3.80@2254.84,310.67 ; v1@2254.84,389.84 v1(2255,390)
  L4 w10: J3.80@2254.84,310.67 v1@2254.84,389.84
X7: J2.81 J3.82 | length 119.5
  L1 w4: v1@2274.37,369.37 v1(2275,370)
  L1 w10: J2.81@2274.37,310.51 v1@2274.37,369.37
  L4 w4: J3.82@2274.37,310.51 J3.82@2274.68,310.83 ; v1@2274.68,369.69 v1(2275,370)
  L4 w10: J3.82@2274.68,310.83 v1@2274.68,369.69
X8: J2.83 J3.84 | length 159.8
  L1 w4: v1@2294.06,389.06 v1(2295,390)
  L1 w10: J2.83@2294.06,310.51 v1@2294.06,389.06
  L4 w4: J3.84@2294.06,310.51 J3.84@2294.53,310.98 ; v1@2294.53,389.53 v1(2295,390)
  L4 w10: J3.84@2294.53,310.98 v1@2294.53,389.53
Y: J2.53 J3.54 | length 126.5
  L1 w11.55: J2.53@1998.78,310.51 v1(1998.78,373.78)
  L4 w11.55: J3.54@1998.78,310.51 v1(1998.78,373.78)
Z: J2.55 J3.56 | length 166.6
  L1 w11.55: J2.55@2018.46,310.51 2018.46,393.28 v1(2018.85,393.67)
  L4 w11.55: J3.56@2018.46,310.51 2018.85,310.9 v1(2018.85,393.67)
pads on no net: FD1.0 FD2.0 FD3.0 J1. J1.4 J1.6 J1.8 J1.10 J1.11 J1.12 J1.13 J1.14 J1.15 J1.16 J1.17 J1.18 J1.19 J1.20 J1.21 J1.22 J1.24 J1.26 J1.45 J1.48 J1.50 J1.52 J1.54 J1.56 J1.58 J1.60 J1.62 J1.64 J1.66 J1.68 J1.70 J1.72 J1.74 J1.76 J1.77 J1.78 J1.79 J1.80 J1.81 J1.82 J1.83 J2. J2.16 J2.18 J2.20 J2.22 J2.24 J2.26 J2.28 J2.30 J2.32 J2.34 J2.36 J2.38 J2.40 J2.42 J2.44 J2.46 J2.48 J2.50 J2.52 J2.54 J2.56 J2.58 J2.60 J2.62 J2.64 J2.66 J2.68 J2.70 J2.72 J2.74 J2.76 J2.78 J2.80 J2.82 J2.84 J2.86 J2.88 J2.90 J2.92 J2.94 J2.96 J2.98 J3. J3.11 J3.13 J3.15 J3.17 J3.19 J3.21 J3.23 J3.25 J3.27 J3.29 J3.31 J3.33 J3.35 J3.37 J3.39 J3.41 J3.43 J3.45 J3.47 J3.49 J3.51 J3.53 J3.55 J3.57 J3.59 J3.61 J3.63 J3.65 J3.67 J3.69 J3.71 J3.73 J3.75 J3.77 J3.79 J3.81 J3.83 J3.85 J3.87 J3.89 J3.91 J3.93 J3.95 J3.96 J3.97 J3.98 J3.99 J3.100 U1.11 U2.11 U3.11 U5.11 U6.11 U7.11 U8.3 U9.1 U9.3 U10.1 U10.3 U10.5 U10.6 U13.3 U13.4 U13.5 U13.6 U13.7 U13.10 U13.11 U13.12 U13.13 U13.14

## Polygon pours and split planes (outlines as drawn)
GND on L1 "GND_L01_P004" (solid, pour order 4): 1480,195 1480,85 1535,85 1535,195
GND on L1 "GND_L01_P003" (solid, pour order 3): 2305,395 2305,230 2400,230 2400,395
GND on L1 "GND_L01_P002" (solid, pour order 2): 2145,230 2145,395 2205,395 2205,230
X1 on L1 "X1_L01_P001" (solid, pour order 1): 2030,395 2030,230 2085,230 2085,395
+5V on L1 "+5V_L01_P000" (solid, pour order 0): 1480,395 1480,230 1535,230 1535,395
GND on L4 "GND_L04_P009" (solid, pour order 9): 2305,395 2305,230 2400,230 2400,395
GND on L4 "GND_L04_P008" (solid, pour order 8): 2145,395 2145,230 2205,230 2205,395
X1 on L4 "X1_L04_P007" (solid, pour order 7): 2030,395 2030,230 2085,230 2085,395
+5V on L4 "+5V_L04_P005" (solid, pour order 5): 1480,395 1535,395 1535,230 1480,230
GND on L4 "GND_L04_P006" (solid, pour order 6): 1480,195 1480,85 1535,85 1535,195
+5V on L3 "+5V_L03_P018" (solid, pour order 18): 0.29,3937.65 3936.88,3937.65 3936.72,3937.49 3936.72,0.11 -0.11,0.11 -0.38,0.38
GND on L3 "GND_L03_P010" (solid, pour order 10): 1525,450 1525,230 2060,230 2060,450
GND on L2 (split plane): 3917.18,20.21 19.83,20.21 19.83,1018.44 787.14,1018.44 791.06,1018.83 794.83,1019.97 798.3,1021.83 801.35,1024.33 803.85,1027.37 805.7,1030.85 806.85,1034.62 807.23,1038.54 807.23,3242.73 806.85,3246.65 805.7,3250.42 803.85,3253.9 801.35,3256.94 798.3,3259.44 794.83,3261.3 791.06,3262.44 787.14,3262.83 19.83,3262.83 19.83,3917.55 3917.18,3917.55

## Keep-outs
Keep-Out Layer:
  the board outline again, w4

## Silkscreen, mask and mechanical layers (free items; w line width, h text height)
Top Overlay:
  text "DEBUG" at 1234.61,3890.43 h60 r180
  text "PROGRAMMER" at 2625,3880 h60 r180
  text "ALARM" at 1640,3720 h60 r180
  text "COMMAND" at 2110,3720 h60 r180
  text "POWER" at 2440,3715 h60 r180
  text "VIRB" at 3375,1925 h98.43 r90
  text "VIRB" at 3255,1865 h78.74 r90
  text "b" at 1530,1496.9 h393.7 r180
  text "W" at 1725,1400 h236.22 r180
  text "R" at 1735,1326.09 h472.44 r180
  text "ionosens" at 2580,1265 h98.43 r180
  text "e" at 1531.84,1206.16 h236.22 r180
  text "UNED" at 2445,1135 h98.43 r180
Mechanical 1:
  circle w0.5: c3937.01,3937.38 r0.12
  circle w0.5: c0,3937.38 r0.12
  circle w0.5: c0,3937.38 r0.12
  circle w0.5: c0,0.38 r0.12
  circle w0.5: c3937.01,0.38 r0.12
  circle w0.5: c0,0.38 r0.12
  circle w0.5: c3937.01,3937.38 r0.12
  circle w0.5: c3937.01,0.38 r0.12
  lines w0.5: 0,0.38 0,1038.27 787.4,1038.27 787.4,3243 0,3243 0,3937.38 3937.01,3937.38 3937.01,0.38 0,0.38
Mechanical 14:
  lines w0.5: 0,1038.27 3346.46,1038.27 3346.46,3243 0,3243
  lines w0.51: 1397.64,1943.51 1555.12,1943.51

## Text inside footprints (layer, text, board x,y; h text height)
J1: Mechanical 15 "2" at 1499.57,3363.27 h39.37 r180; Mechanical 15 "1" at 1499.57,3658.15 h39.37 r180
J2: Mechanical 15 "1" at 1499.57,402.24 h39.37 r180; Mechanical 15 "2" at 1499.57,107.36 h39.37 r180
J3: Mechanical 15 "1" at 1499.57,73.11 h39.37; Mechanical 15 "2" at 1499.57,367.99 h39.37
J4: Top Overlay "1" at 3036.65,3508 h50 r180; Top Overlay "5" at 2633.86,3508 h50 r180; Top Overlay "6" at 2633.86,3408 h50 r180; Top Overlay "2" at 3036.65,3408 h50 r180; Mechanical 13 "1" at 3036.65,3508 h50 r180; Mechanical 13 "2" at 3036.65,3408 h50 r180; Mechanical 13 "5" at 2633.86,3508 h50 r180; Mechanical 13 "6" at 2633.86,3408 h50 r180
J5: Top Overlay "6" at 946.14,3460 h50; Top Overlay "1" at 243.35,3460 h50; Mechanical 13 "6" at 946.14,3460 h50; Mechanical 13 "1" at 243.35,3460 h50
J6: Top Overlay "40" at 1155,3290 h50 r180; Top Overlay "39" at 1160,2970 h50 r180; Top Overlay "2" at 3035,3285 h50 r180; Top Overlay "1" at 3030,2965 h50 r180; Mechanical 13 "40" at 1035.79,3180.2 h50 r180; Mechanical 13 "39" at 1035.79,3080.2 h50 r180; Mechanical 13 "2" at 3138.58,3180.2 h50 r180; Mechanical 13 "1" at 3138.58,3080.2 h50 r180